# EAGLE board Pinduino-Nano-Sys11b-AR (EAGLE 7.7.0)
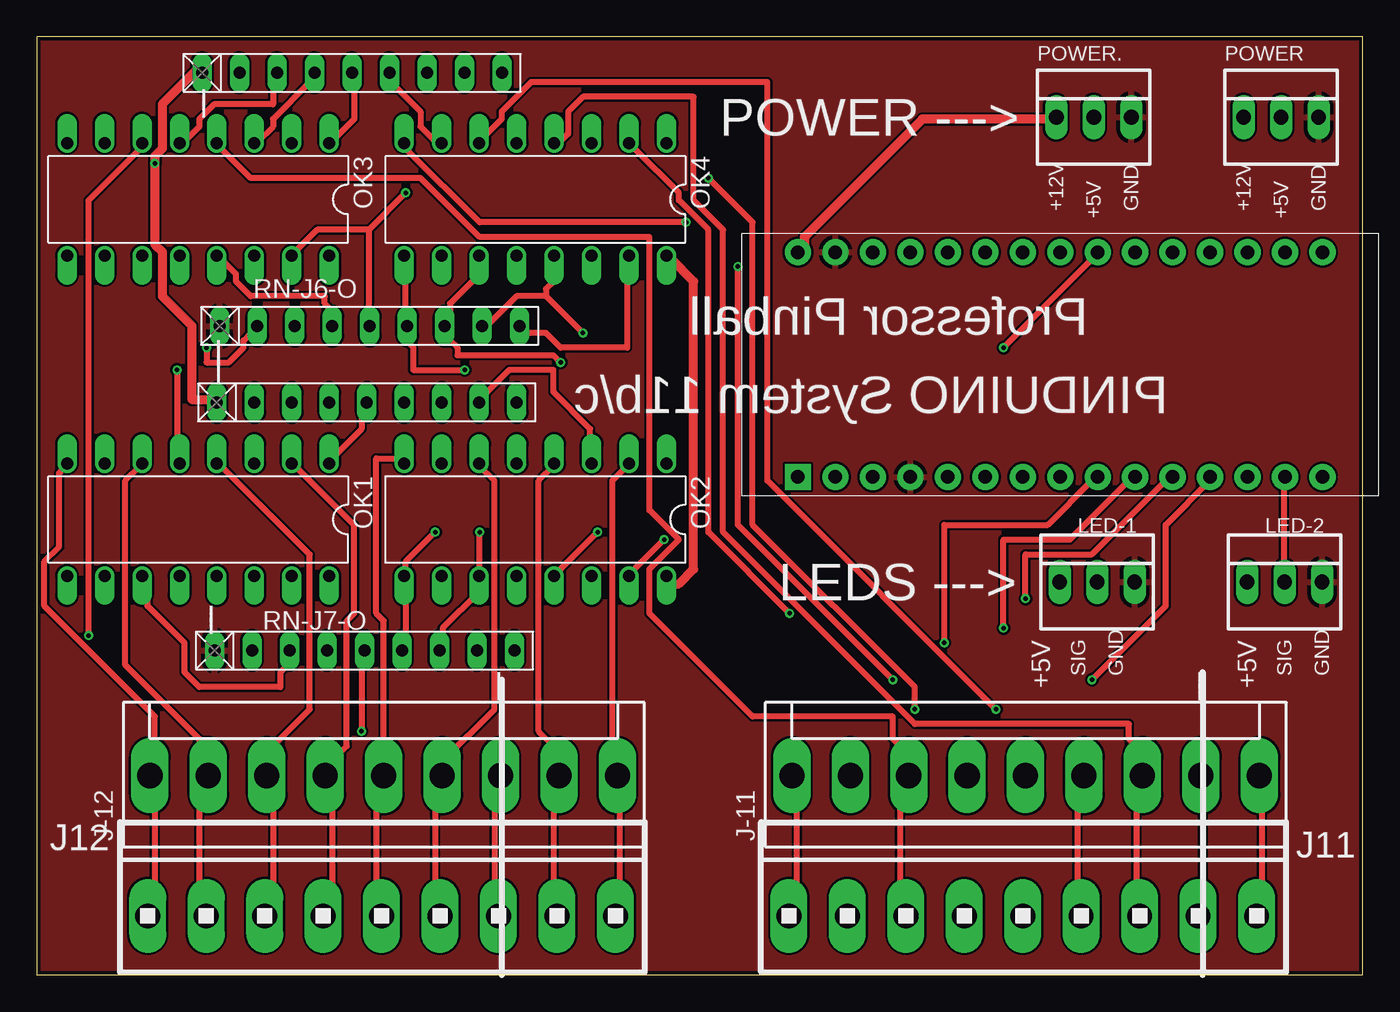
[diagram p0: board, top side]
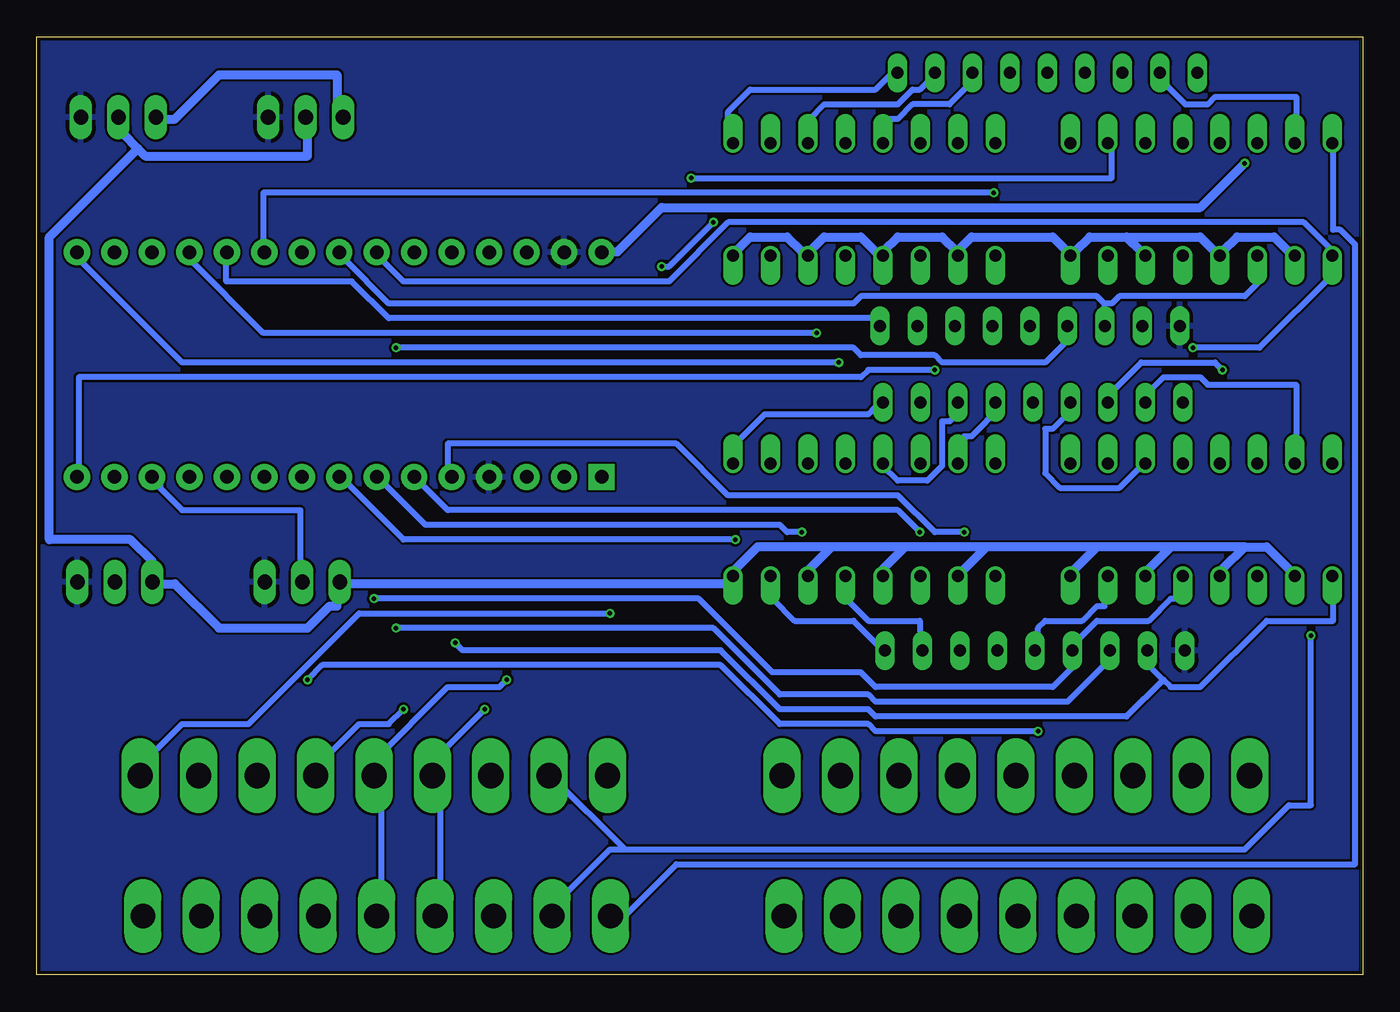
[diagram p1: board, bottom side, seen from below]

Size 89.84 x 63.57 mm. Coordinates in mm from the lower left corner, seen from the top.
Outline: 0,0 89.84,0 89.84,63.57 0,63.57 0,0
Copper layers (1*16): Top 0.035mm / dielectric 1.5mm / Bottom 0.035mm
Design rules "SeeedStudio_2layer_DRU_no_angle_20140221": minimum track width 6mil, minimum drill 12mil, track to track 6mil, track to pad 6mil, pad to pad 6mil, via to via 6mil, smd to smd 0mil, copper to edge 10mil, drill to drill 10mil, minimum pad ring 10mil, minimum via ring 6mil, stop-mask expansion 2mil, vias tented up to drill 100mil, thermal gap 10mil
Net classes: 0 default: width 0.406 mm; 1 Power: width 0.61 mm; 2 GND: width 0.61 mm

## Footprints (pad centres in the part's own frame; a part is rotated, then mirrored left to right if it is on the bottom)
1X9MTA = drill 1.676 long: 1 15.85,0; 2 11.887,0; 3 7.925,0; 4 3.962,0; 5 0,0; 6 -3.962,0; 7 -7.925,0; 8 -11.887,0; 9 -15.85,0
KK-156-9 = drill 1.7 pad 2.184 long: 1 -15.84,0; 2 -11.88,0; 3 -7.92,0; 4 -3.96,0; 5 0,0; 6 3.96,0; 7 7.92,0; 8 11.88,0; 9 15.84,0
22-23-2031 = drill 1 long: 1 -2.54,0; 2 0,0; 3 2.54,0
ARDUINO_NANO2 = drill 0.914 pad 1.778 square: J1.1 -7.62,17.78 | drill 0.914 pad 1.778: J1.2 -7.62,15.24; J1.3 -7.62,12.7; J1.4 -7.62,10.16; J1.5 -7.62,7.62; J1.6 -7.62,5.08; J1.7 -7.62,2.54; J1.8 -7.62,0; J1.9 -7.62,-2.54; J1.10 -7.62,-5.08; J1.11 -7.62,-7.62; J1.12 -7.62,-10.16; J1.13 -7.62,-12.7; J1.14 -7.62,-15.24; J1.15 -7.62,-17.78; J2.1 7.62,17.78; J2.2 7.62,15.24; J2.3 7.62,12.7; J2.4 7.62,10.16; J2.5 7.62,7.62; J2.6 7.62,5.08; J2.7 7.62,2.54; J2.8 7.62,0; J2.9 7.62,-2.54; J2.10 7.62,-5.08; J2.11 7.62,-7.62; J2.12 7.62,-10.16; J2.13 7.62,-12.7; J2.14 7.62,-15.24; J2.15 7.62,-17.78
DIL16 = drill 0.813 offset: 1 -8.89,-3.81; 2 -6.35,-3.81; 3 -3.81,-3.81; 4 -1.27,-3.81; 5 1.27,-3.81; 6 3.81,-3.81; 7 6.35,-3.81; 8 8.89,-3.81; 9 8.89,3.81; 10 6.35,3.81; 11 3.81,3.81; 12 1.27,3.81; 13 -1.27,3.81; 14 -3.81,3.81; 15 -6.35,3.81; 16 -8.89,3.81
RN-9 = drill 0.813 long: 1 -10.16,0; 2 -7.62,0; 3 -5.08,0; 4 -2.54,0; 5 0,0; 6 2.54,0; 7 5.08,0; 8 7.62,0; 9 10.16,0

## Placement (x,y rotation side)
J11  J11  [1X9MTA]  66.81,3.99 0 top
J12  J12  [1X9MTA]  23.36,3.99 0 top
J-11  J 11  [KK-156-9]  67,13.5 0 top
J-12  J 12  [KK-156-9]  23.5,13.5 0 top
LED-1  [22-23-2031]  71.85,26.62 0 top
LED-2  [22-23-2031]  84.55,26.62 0 top
MODUL1  ARDUINO_NANO2  [ARDUINO_NANO2]  69.35,41.36 90 top
OK1  TIL199  [DIL16]  10.93,30.86 180 top
OK2  TIL199  [DIL16]  33.79,30.86 180 top
OK3  TIL199  [DIL16]  10.93,52.56 180 top
OK4  TIL199  [DIL16]  33.79,52.56 180 top
POWER  [22-23-2031]  84.32,58.12 0 top
POWER.  [22-23-2031]  71.62,58.12 0 top
RN-J6-I  10k  [RN-9]  21.35,61.14 0 top
RN-J6-O  10k  [RN-9]  22.56,43.97 0 top
RN-J7-I  10k  [RN-9]  22.35,38.79 0 top
RN-J7-O  10k  [RN-9]  22.2,21.97 0 top

## Library data of the parts
J11 J12 = con-amp
J-11 J-12 = con-molex; OC_FARNELL: unknown; OC_NEWARK: unknown
LED-1 LED-2 POWER POWER. = con-molex; MF: MOLEX; MPN: 22-23-2031; OC_FARNELL: 1462950; OC_NEWARK: 30C0862
MODUL1 = arduino; ANZAHL: 2; MODUL: TRUE; STECKX0: -76200; STECKX1: 76200; STECKY0: 177800; STECKY1: 177800
OK1-OK4 = optocoupler; MPN: TIL 199; OC_FARNELL: 1683370; OC_NEWARK: 05R6483
RN-J6-I RN-J6-O RN-J7-I RN-J7-O = resistor-net; OC_FARNELL: unknown; OC_NEWARK: unknown

## Nets
3V3: MODUL1.J2.14
+5V: MODUL1.J2.4
ARD+5V [Power]: LED-1.1 LED-2.1 OK1.10 OK1.12 OK1.14 OK1.16 OK2.10 OK2.12 OK2.14 OK2.16 OK3.10 OK3.12 OK3.14 OK3.16 OK4.10 OK4.12 OK4.14 OK4.16 POWER.2 POWER..2
AREF: MODUL1.J2.13
GND: LED-1.3 LED-2.3 MODUL1.J1.4 MODUL1.J2.2 POWER.3 POWER..3 RN-J6-O.1 RN-J7-O.1
N$1: J12.6 J-12.4 OK1.2
N$2: MODUL1.J1.9 OK1.9 RN-J7-O.2
N$3: OK1.3 RN-J7-I.4
N$4: OK1.5 RN-J7-I.3
N$5: OK1.7 RN-J7-I.2
N$6: OK2.1 RN-J7-I.9
N$7: OK2.3 RN-J7-I.8
N$8: OK2.5 RN-J7-I.7
N$9: OK1.1 RN-J7-I.5
N$10: J12.9 J-12.1 OK1.8
N$11: J12.8 J-12.2 OK1.6
N$12: J12.7 J-12.3 OK1.4
N$13: OK2.7 RN-J7-I.6
N$14: J12.5 J-12.5 OK2.8
N$15: J11.9 J-11.1 OK3.8
N$16: J12.2 J-12.8 OK2.4
N$17: J12.1 J-12.9 OK2.2
N$18: MODUL1.J1.10 OK1.11 RN-J7-O.3
N$19: J11.7 J-11.3 OK3.4
N$20: J11.5 J-11.5 OK4.8
N$21: J11.4 J-11.6 OK4.6
N$22: J11.3 J-11.7 OK4.4
N$23: J12.3 J-12.7
N$25: J11.2 J-11.8
N$26: MODUL1.J2.11 OK4.15 RN-J6-O.9
N$27: J11.1 J-11.9 OK4.2
N$29: OK4.1 RN-J6-I.9
N$30: OK4.3 RN-J6-I.8
N$31: OK4.5 RN-J6-I.7
N$32: OK3.3 RN-J6-I.4
N$33: OK3.1 RN-J6-I.5
N$34: OK3.5 RN-J6-I.3
N$35: OK4.7 RN-J6-I.6
N$37: OK3.7 RN-J6-I.2
N$38: MODUL1.J1.8 OK2.15 RN-J7-O.9
N$39: MODUL1.J1.11 OK1.13 RN-J7-O.4
N$40: J11.8 J-11.2 OK3.6
N$41: MODUL1.J1.12 OK1.15 RN-J7-O.5
N$42: MODUL1.J2.9 OK3.13 RN-J6-O.4
N$43: MODUL1.J1.5 OK2.9 RN-J7-O.6
N$44: LED-2.2 MODUL1.J1.14
N$45: LED-1.2 MODUL1.J1.13
N$47: J12.4 J-12.6 OK2.6
N$48: J11.6 J-11.4 OK3.2
N$50: MODUL1.J2.15 OK4.11 RN-J6-O.7
N$52: MODUL1.J1.15 OK4.9 RN-J6-O.6
N$53: MODUL1.J2.10 OK3.15 RN-J6-O.5
N$55: MODUL1.J2.12 OK4.13 RN-J6-O.8
N$56: MODUL1.J1.6 OK2.11 RN-J7-O.7
N$57: MODUL1.J1.7 OK2.13 RN-J7-O.8
N$58: MODUL1.J2.8 OK3.11 RN-J6-O.3
N$59: MODUL1.J2.7 OK3.9 RN-J6-O.2
N$61 [GND]: MODUL1.J2.1 POWER.1 POWER..1 RN-J6-I.1 RN-J7-I.1

## Tracks (layer width: path | path; a pad name or v marks a point on that pad's centre or on a via)
ARD+5V
  Top 0.61: OK4.16 43,48.5 44.5,47 44.5,27.5 43.5,26.5 43,26.5 43,27 OK2.16
  Bottom 0.61: 83,56 84,57 84,58 POWER.2 | 83,56 82.5,55.5 71.5,55.5 71.5,58 POWER..2 | 83,56 89,50 89,29.5 83.5,29.5 82,28 82,27 LED-2.1 82,26.5 80.5,26.5 77.5,23.5 71.5,23.5 70,25 69.5,25 69.5,26.5 LED-1.1 69,26.5 43,26.5 42.5,27 OK2.16 42.5,27.5 41,29 36,29 | OK3.10 5,49 6,50 8.5,50 9.5,49 OK3.12 10,49 11,50 16,50 | 16,50 15,49 OK3.14 | 16,50 18.5,50 19.5,49 OK3.16 20,49 21,50 26.5,50 27.5,49 | 27.5,49 28.5,50 31.5,50 32.5,49 OK4.12 33,49 34,50 36.5,50 37.5,49 OK4.14 38,49 39,50 41.5,50 42.5,49 OK4.16 | 27.5,49 OK4.10 | 8,29 6.5,29 5,27.5 OK1.10 | 8,29 9.5,27.5 OK1.12 | 13,29 14.5,27.5 OK1.14 | 8,29 13,29 | 18,29 19.5,27.5 OK1.16 | 13,29 18,29 | 25.5,29 27,27.5 OK2.10 | 18,29 25.5,29 | 31,29 32.5,27.5 OK2.12 | 25.5,29 31,29 | 36,29 37.5,27.5 OK2.14 | 31,29 36,29
GND
  pour Top: -1.27,64.77 -1.27,-2.54 92.71,-2.54 92.71,64.77
  pour Bottom: -2.54,66.04 -2.54,-1.27 91.44,-1.27 91.44,66.04
N$1
  Top 0.406: 20,13.5 20,14.5 21,15.5 21,24 21.5,24.5 21.5,30.5 17.5,34.5 OK1.2 | 20,13.5 20,4.5 19.5,4 J12.6 | 20,13.5 J-12.4
N$2  (via drill 0.3)
  Top 0.406: v61.5,22.5 61.5,30.5 68.5,30.5 71.5,33.5 MODUL1.J1.9
  Bottom 0.406: 13.5,20 15,21.5 RN-J7-O.2 | 13.5,20 13,19.5 11,19.5 6.5,24 2,24 2,27 OK1.9 | v61.5,22.5 61,22 43.5,22 39.5,18 33.5,18 33,17.5 16,17.5 13.5,20
N$3
  Bottom 0.406: OK1.3 15,34.5 16.5,33 20.5,33 21.5,34 21.5,37 21,37 19.5,38.5 RN-J7-I.4
N$4  (via drill 0.3)
  Top 0.406: v9.5,41 9.5,35 OK1.5
  Bottom 0.406: v9.5,41 10,41.5 15,41.5 17.5,39 RN-J7-I.3
N$5
  Bottom 0.406: OK1.7 4.5,35 4.5,40 10.5,40 11,40.5 13.5,40.5 15,39 RN-J7-I.2
N$6
  Bottom 0.406: RN-J7-I.9 33,38.5 33.5,38 40.5,38 42.5,36 42.5,35 OK2.1
N$7
  Top 0.406: RN-J7-I.8 30,39 32,41 35,41 35,39.5 37.5,37 37.5,35 OK2.3
N$8
  Bottom 0.406: OK2.5 32.5,34.5 31.5,33.5 29.5,33.5 28.5,34.5 28.5,37.5 28,37.5 27,38.5 RN-J7-I.7
N$9
  Top 0.406: OK1.1 20,35 22,37 22,38.5 RN-J7-I.5
N$10
  Top 0.406: 8,13.5 8,17.5 0.5,25 0.5,28 1.5,29 1.5,34 2,34.5 OK1.8 | 8,13.5 8,4 J12.9 | 8,13.5 J-12.1
N$11
  Top 0.406: 11,16 11.5,15.5 11.5,13.5 J-12.2 | 11,16 6,21 6,33.5 7,34.5 OK1.6 | 11,16 11,4 J12.8
N$12
  Top 0.406: 16,13.5 16,15.5 18.5,18 18.5,28.5 12.5,34.5 OK1.4 | 16,13.5 16,4.5 15.5,4 J12.7 | 16,13.5 J-12.3
N$13
  Bottom 0.406: OK2.7 27,35 27,36.5 26.5,36.5 24.5,38.5 RN-J7-I.6
N$14
  Top 0.406: OK2.8 24.5,35 23,35 23,24.5 23.5,24 J-12.5 23,13 23,4 J12.5
N$15
  Top 0.406: J-11.1 51.5,13.5 51.5,4.5 51,4 J11.9
  Bottom 0.406: OK3.8 2,56 2,50.5 1.5,50.5 0.5,49.5 0.5,7.5 46.5,7.5 50,4 50.5,4 J11.9
N$16
  Top 0.406: 35,13.5 35,15.5 34,16.5 34,33.5 35,34.5 OK2.4 | 35,13.5 35,4 J12.2 | 35,13.5 J-12.8
N$17
  Top 0.406: OK2.2 40,34.5 39,33.5 39,13.5 J-12.9 39.5,13.5 39.5,4 J12.1
N$18  (via drill 0.3)
  Top 0.406: OK1.11 7.5,27 7.5,25 10,22.5 10,20.5 11,19.5 16.5,19.5 16.5,20.5 17,21 17,21.5 RN-J7-O.3 | v65.5,23.5 65.5,29.5 70,29.5 74,33.5 MODUL1.J1.10
  Bottom 0.406: v65.5,23.5 44,23.5 39.5,19 33.5,19 33,18.5 20,18.5 17,21.5 RN-J7-O.3
N$19
  Top 0.406: 58.5,15.5 59,15 59,13.5 J-11.3 58.5,15.5 | 58.5,15.5 58,16 58,17.5 48.5,17.5 41.5,24.5 41.5,27.5 43.5,29.5 41.5,31.5 41.5,50 30,50 26,54 14.5,54 12.5,56 OK3.4 | 58.5,15.5 58.5,4 J11.7
N$20  (via drill 0.3)
  Top 0.406: v44,51 30,51 25,56 OK4.8 | v47.5,48 47.5,30.5 v58,20
  Bottom 0.406: v44,51 47,48 v47.5,48 | v58,20 58.5,19.5 62,19.5 67,14.5 J-11.5 66.5,13.5 66.5,4 J11.5
N$21  (via drill 0.3)
  Top 0.406: v65,18 49.5,33.5 49.5,60.5 33.5,60.5 31.5,58.5 31.5,58 30,56.5 OK4.6 | J11.4 70.5,4 70.5,13.5 J-11.6
  Bottom 0.406: v65,18 66,17 68,17 70.5,14.5 70.5,13.5 J-11.6
N$22
  Top 0.406: 74.5,13.5 74.5,15.5 74,16 74,17 59.5,17 46.5,30 46.5,50.5 44.5,52.5 44.5,59.5 37,59.5 36,58.5 36,57 35.5,56.5 OK4.4 | 74.5,13.5 74.5,4 J11.3 | 74.5,13.5 J-11.7
N$23
  Top 0.406: J12.3 31,4 31,13.5 J-12.7
N$25
  Top 0.406: J11.2 79,4 79,13.5 J-11.8
N$26
  Top 0.406: RN-J6-O.9 33,43.5 34.5,43.5 35.5,42.5 40,42.5 40,48.5 OK4.15
  Bottom 0.406: MODUL1.J2.11 77,48.5 77,47 68.5,47 66,44.5 33,44.5 32.5,44 RN-J6-O.9
N$27  (via drill 0.3)
  Top 0.406: v51,24.5 45.5,30 45.5,50.5 43.5,52.5 43.5,53 40.5,56 OK4.2 | J11.1 83,4 83,13.5 J-11.9
  Bottom 0.406: v51,24.5 68,24.5 75.5,17 80,17 82.5,14.5 82.5,13.5 J-11.9
N$29
  Bottom 0.406: RN-J6-I.9 32,61 33,60 41.5,60 43,58.5 43,56.5 OK4.1
N$30
  Bottom 0.406: RN-J6-I.8 29,61 30,60 30.5,60 31.5,59 36.5,59 37.5,58 37.5,56.5 OK4.3
N$31
  Bottom 0.406: OK4.5 32.5,56.5 32.5,58 31.5,58 30.5,59 28,59 26,61 RN-J6-I.7
N$32
  Top 0.406: OK3.3 15,56.5 16,57.5 16,58 18.5,60.5 18.5,61 RN-J6-I.4
N$33
  Top 0.406: OK3.1 20,56.5 21.5,58 21.5,61 RN-J6-I.5
N$34
  Top 0.406: OK3.5 10,56.5 11,57.5 11,58 12,59 16,59 16,61 RN-J6-I.3
N$35
  Top 0.406: OK4.7 27,56.5 26,57.5 26,58.5 24,60.5 24,61 RN-J6-I.6
N$37
  Bottom 0.406: OK3.7 4.5,56.5 4.5,59.5 10,59.5 10.5,59 12,59 14,61 RN-J6-I.2
N$38  (via drill 0.3)
  Top 0.406: v42.5,29.5 40.5,27.5 OK2.15
  Bottom 0.406: RN-J7-O.9 32.5,22 34.5,24 38.5,24 40,25.5 40,27 OK2.15 | v42.5,29.5 65,29.5 69,33.5 MODUL1.J1.8
N$39  (via drill 0.3)
  Top 0.406: v67,25.5 67,28.5 71.5,28.5 76.5,33.5 MODUL1.J1.11
  Bottom 0.406: OK1.13 12.5,27 12.5,25.5 13,25.5 14.5,24 18,24 20,22 RN-J7-O.4 19.5,21.5 19.5,21 21,19.5 33,19.5 34,20.5 40,20.5 45,25.5 v67,25.5
N$40  (via drill 0.3)
  Top 0.406: v3.5,23 3.5,52.5 7,56 OK3.6
  Bottom 0.406: v3.5,23 3.5,11.5 5,11.5 8,8.5 50,8.5 | 50,8.5 51,8.5 54.5,5 54.5,4 J11.8 | 50,8.5 55,13.5 J-11.2
N$41  (via drill 0.3)
  Top 0.406: v71.5,20 76.5,25 76.5,30.5 79.5,33.5 MODUL1.J1.12 | v22,16.5 22,21.5 RN-J7-O.5
  Bottom 0.406: OK1.15 17.5,27 17.5,25 18,25 19,24 21.5,24 22,23.5 22,22 RN-J7-O.5 | v71.5,20 70.5,21 43.5,21 39.5,17 33.5,17 33,16.5 v22,16.5
N$42  (via drill 0.3)
  Top 0.406: OK3.13 12.5,48.5 13.5,47.5 13.5,47 14.5,46 19.5,46 19.5,45.5 20,45 20,44 RN-J6-O.4 | v65.5,42.5 71.5,48.5 MODUL1.J2.9
  Bottom 0.406: v65.5,42.5 34.5,42.5 34,42 29,42 28.5,41.5 21.5,41.5 20,43 20,43.5 RN-J6-O.4
N$43  (via drill 0.3)
  Top 0.406: RN-J7-O.6 25,22 25,27 OK2.9 25,27.5 25,28 v27,30
  Bottom 0.406: v27,30 29,30 31.5,32.5 43,32.5 46.5,36 62,36 62,34 MODUL1.J1.5
N$44
  Top 0.406: LED-2.2 84.5,27 84.5,33.5 MODUL1.J1.14
N$45
  Bottom 0.406: LED-1.2 72,27 72,31.5 80,31.5 81.5,33 81.5,33.5 82,33.5 MODUL1.J1.13
N$47
  Top 0.406: OK2.6 30,34.5 31,33.5 31,18 27.5,14.5 27.5,13.5 J-12.6 27,13.5 27,4 J12.4
N$48  (via drill 0.3)
  Top 0.406: v45.5,54 48.5,51 48.5,30.5 59.5,19.5 v59.5,18
  Bottom 0.406: v45.5,54 17,54 17,56 OK3.2 | v59.5,18 63,14.5 63,13.5 | 63,13.5 62.5,13.5 62.5,4 J11.6 | 63,13.5 J-11.4
N$50  (via drill 0.3)
  Top 0.406: OK4.11 30,48.5 30,47.5 28,45.5 28,44 RN-J6-O.7 28,43.5 28,43 28.5,42.5 28.5,42 35,42 v35.5,41.5
  Bottom 0.406: v35.5,41.5 80,41.5 87,48.5 MODUL1.J2.15
N$52  (via drill 0.3)
  Top 0.406: OK4.9 25,48.5 25,44 RN-J6-O.6 25,43.5 25,43 25.5,42.5 25.5,41 v29,41
  Bottom 0.406: v29,41 33.5,41 34,40.5 87,40.5 87,34 MODUL1.J1.15
N$53  (via drill 0.3)
  Top 0.406: 22.5,50.5 19,50.5 17.5,49 OK3.15 | 22.5,50.5 22.5,44 RN-J6-O.5 | 22.5,50.5 v25,53
  Bottom 0.406: v25,53 74.5,53 74.5,49 MODUL1.J2.10
N$55  (via drill 0.3)
  Top 0.406: 34.5,46 32.5,46 30.5,44 RN-J6-O.8 | 34.5,46 34.5,46.5 35,47 35,48.5 OK4.13 | 34.5,46 v37,43.5
  Bottom 0.406: v37,43.5 74.5,43.5 79.5,48.5 MODUL1.J2.12
N$56  (via drill 0.3)
  Top 0.406: RN-J7-O.7 27.5,22 27.5,23.5 30,26 30,27 OK2.11 30,27.5 v30,30
  Bottom 0.406: v30,30 31.5,31.5 62,31.5 64,33.5 MODUL1.J1.6
N$57  (via drill 0.3)
  Top 0.406: v38,30 35.5,27.5 OK2.13
  Bottom 0.406: RN-J7-O.8 30,22 30,24 33.5,24 35,25.5 35,27 OK2.13 | v38,30 39,30 39.5,30.5 63.5,30.5 66.5,33.5 MODUL1.J1.7
N$58
  Bottom 0.406: 17.5,45.5 17.5,44 RN-J6-O.3 | 17.5,45.5 17,45.5 16.5,46 8,46 7,47 7,48.5 OK3.11 | 17.5,45.5 18,46 34,46 34.5,45.5 66,45.5 69,48.5 MODUL1.J2.8
N$59  (via drill 0.3)
  Top 0.406: v11.5,42.5 11.5,41.5 13,41.5 14,42.5 14,43 14.5,43.5 RN-J6-O.2
  Bottom 0.406: v11.5,42.5 7,42.5 2,47.5 2,48.5 OK3.9 2,49 4,51 43,51 47,47 65,47 66.5,48.5 MODUL1.J2.7
N$61  (via drill 0.3)
  Top 0.61: RN-J7-I.1 12,39 10.5,39 10.5,44 8.5,46 8.5,49 8,49.5 v8,55 8,55.5 8.5,56 8.5,59 11,61.5 RN-J6-I.1 | MODUL1.J2.1 52,49 52,50 60,58 69,58 POWER..1
  Bottom 0.61: POWER..1 69.5,58.5 69.5,61 77.5,61 80.5,58 81.5,58 POWER.1 | v8,55 11,52 47.5,52 50.5,49 51.5,49 MODUL1.J2.1

## Text on the board
tNames: -- | -- | POWER ---> | +5V | +5V | +12V | GND | +12V | GND | Professor Pinball | -- | -- | -- | -- | PINDUINO System 11b/c | LEDS ---> | -- | -- | +5V | +5V | SIG | GND | SIG | GND | -- | -- | -- | --